# Altium PCB FOSS JTAG.PcbDoc
Units mil, origin at the board's own origin, x right, y up, seen from the top; angles counter-clockwise.
Board outline 1181.1 x 787.4 mil, 2 copper layers (Top Layer, Bottom Layer); 27 components, 28 nets, 132 pads, 51 vias.
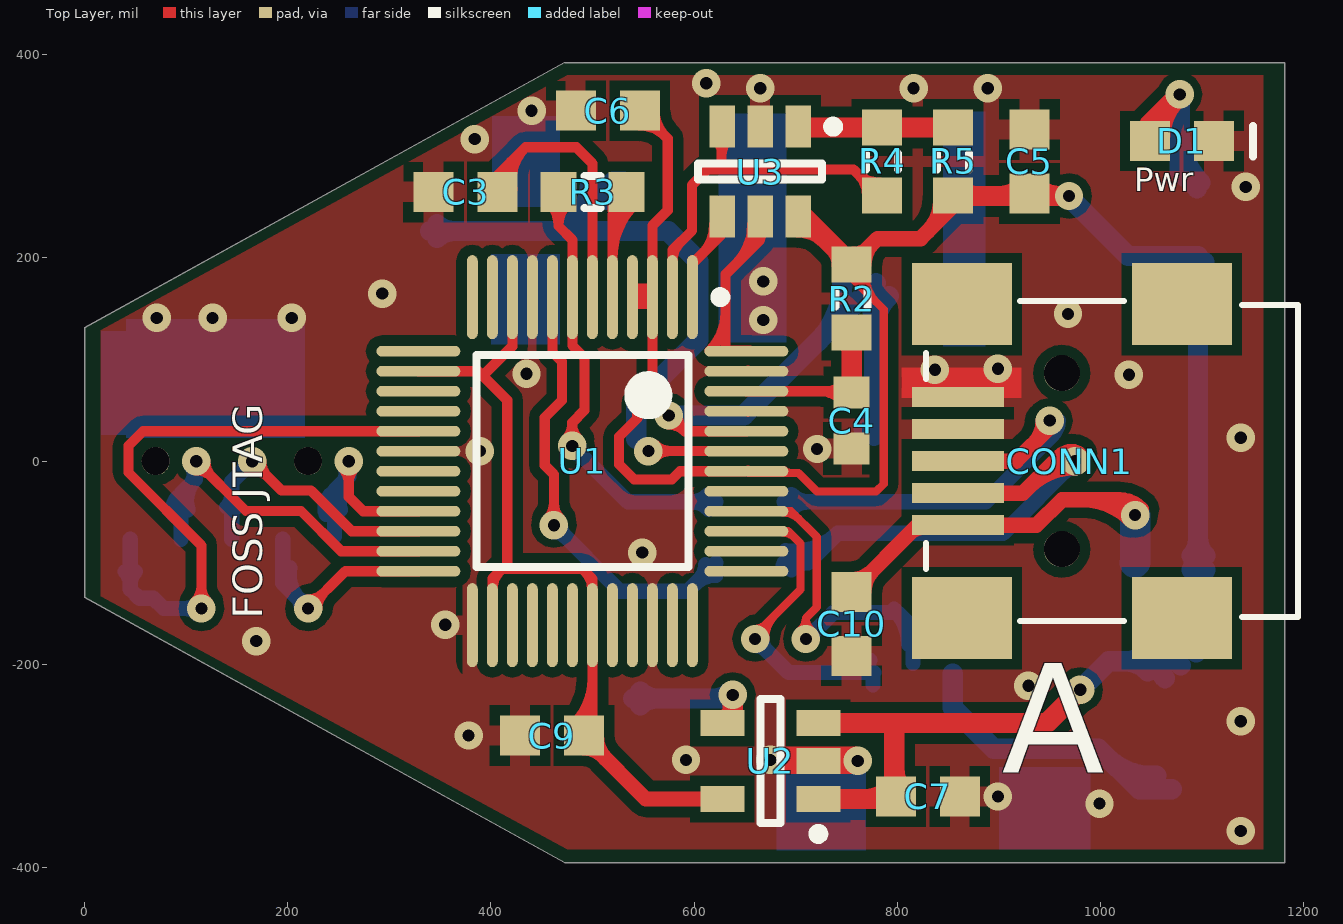
[diagram p0: Top Layer view]
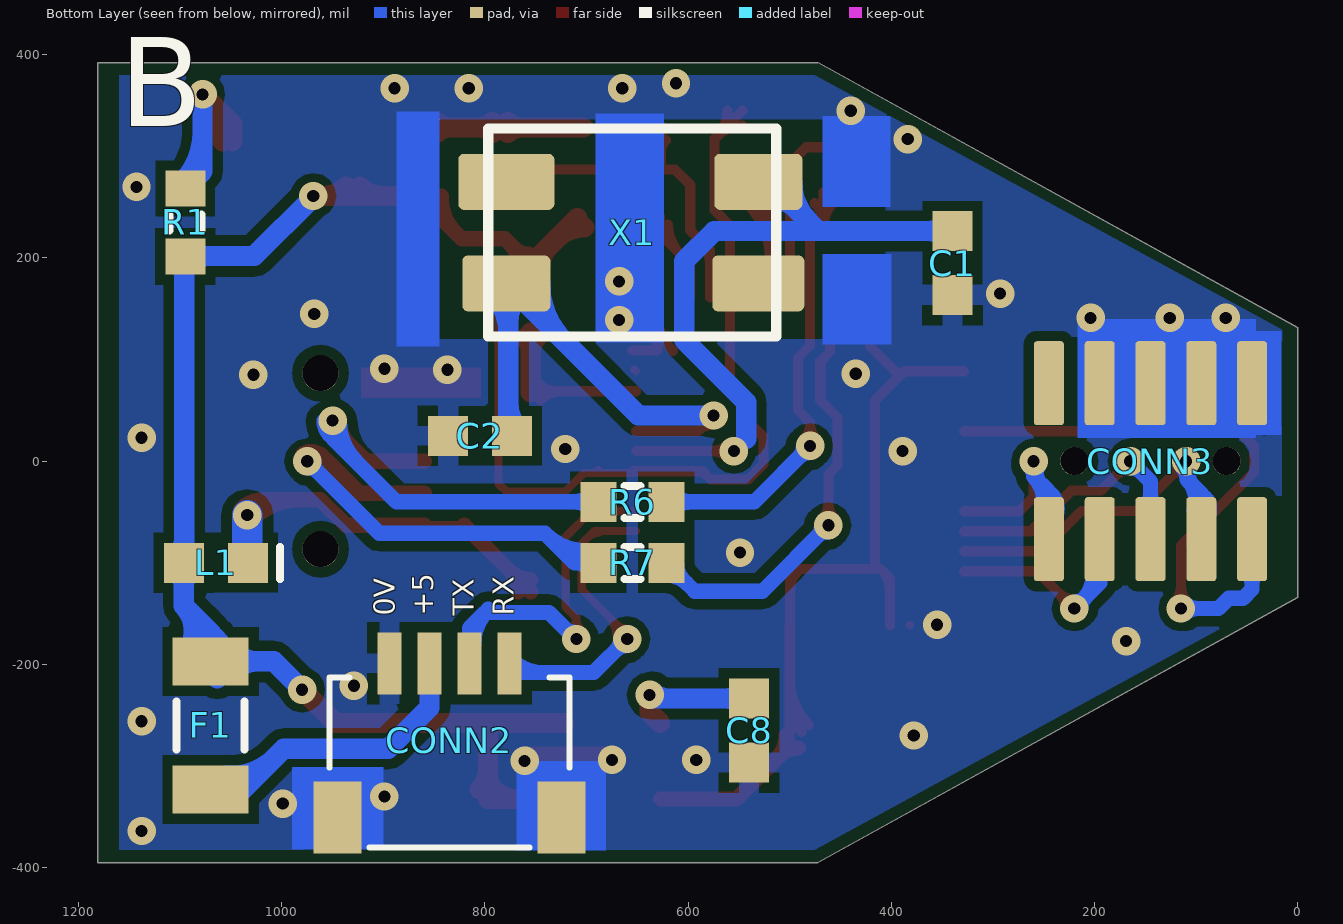
[diagram p1: Bottom Layer view, seen from below]
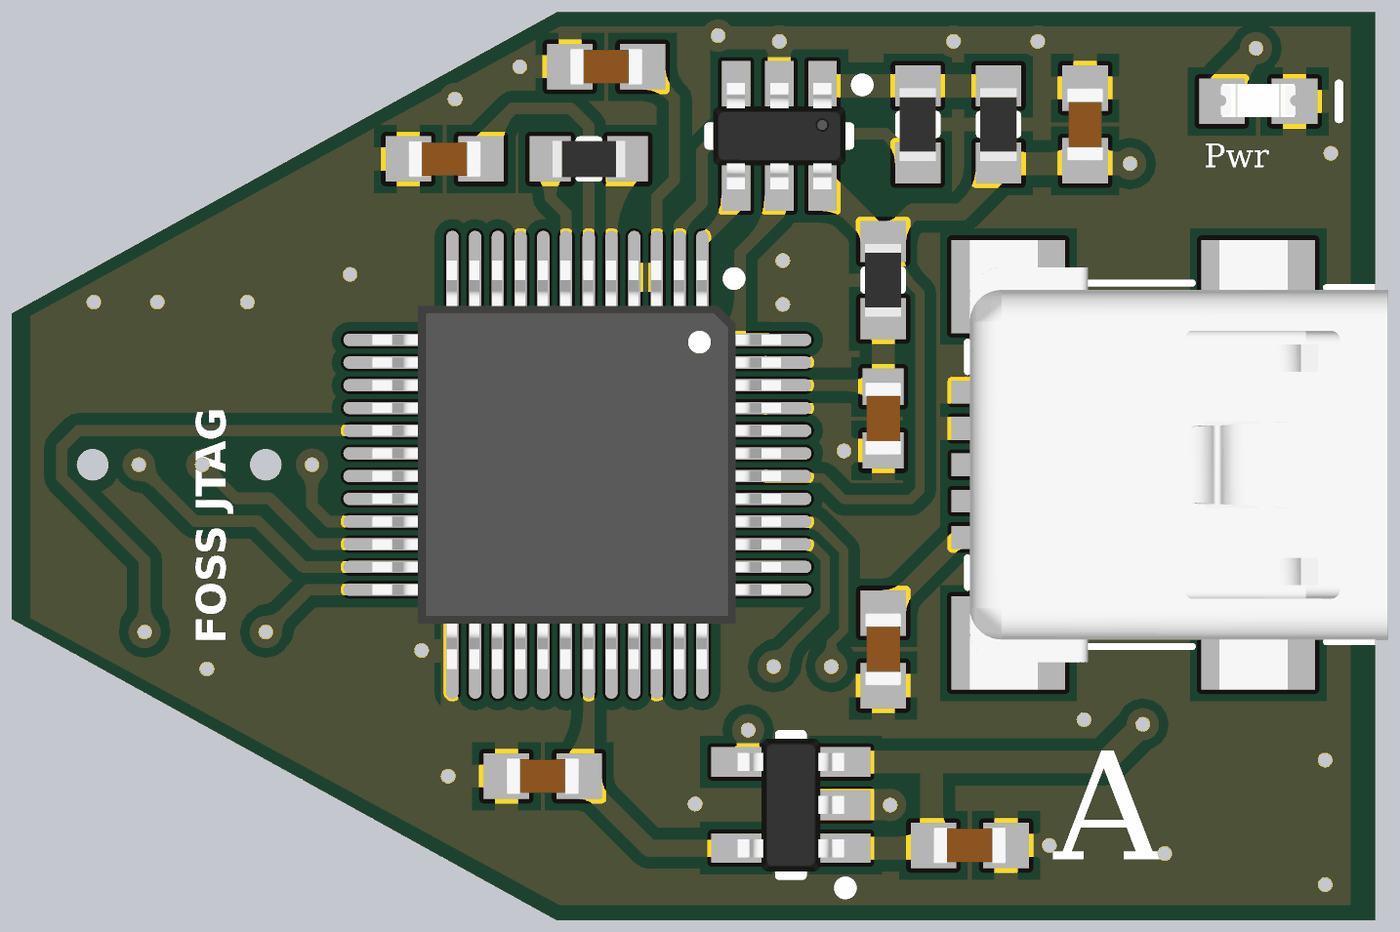
[diagram p2: 3D render of the assembled board from above, using the file's embedded part models]
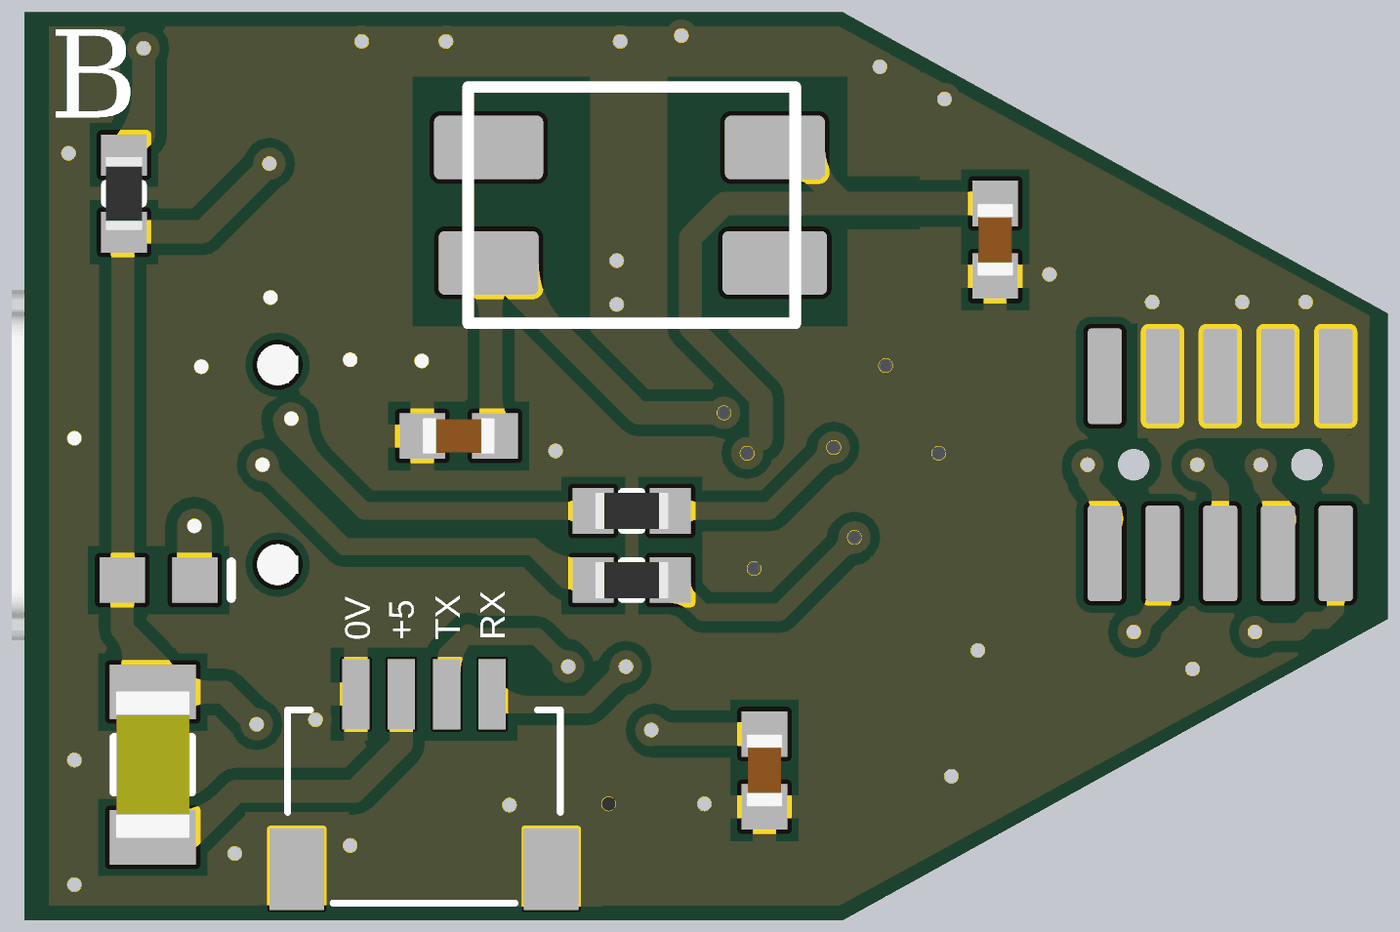
[diagram p3: 3D render of the assembled board from below, using the file's embedded part models]

## Layer stack, top to bottom
Top Layer: signal copper 1.4
Dielectric: dielectric 12.6, FR-4, Dk 4.8
Bottom Layer: signal copper 1.4

## Board outline
0,-133.78 472.44,-395 1181.1,-395 1181.1,392.4 472.44,392.4 0,131.18

## Design rules (kind name [scope] priority, off if disabled: settings)
Clearance PolyHCClearance [(InPolygon) vs InNet('POWER_IN') OR InNet('+VIN')] p1: gap=25
Clearance ViaClearance [(IsVia)] p2: gap=8
Clearance SmallFootPrint [(HasFootprint('SSOP20') or HasFootprint('0603x8') or HasFootprint('Molex-0610') or HasFootprint('54550-2094-C') or HasFootprint('TSOP48_M') or HasFootprint('QFP208_M') or HasFootprint('TSOP2-54_M') or HasFootprint('LQFP-32_M') or HasFootprint('LQFP-48_M')) vs not (InPolygon)] p3: gap=4
Clearance PolyClearance [(InPolygon)] p4: gap=10
Clearance [NOT (HasFootPrint('10MSOP') OR HasFootPrint('PCIEMINILATCH'))] p5: gap=8
ComponentClearance [NOT (HasFootprint('NX1255GB')) vs NOT (HasFootprint('NX1255GB'))] p1: gap=10 collisioncheckmode=3 verticalgap=10 showdistances=FALSE
DiffPairsRouting [All] p1: maxlimit=100 minlimit=8 mostfreqgap=10 maxuncoupledlength=500
FabricationTestPointUsage TestPointUsage [All] p1: valid=0 allowmultiple=TRUE
FabricationTestpoint Testpoint [All] p1: side=3 testpointundercomponent=TRUE minsize=40 maxsize=100 preferedsize=60 minholesize=0 maxholesize=40 preferedholesize=32 testpointgrid=1 allowsidetop=TRUE allowsidebottom=TRUE usegrid=TRUE gridtolerance=0.01
Height [All] p1: minheight=0 maxheight=1968.5 prefheight=500
HoleSize [All] p1: absolutevalues=TRUE maxlimit=165.35 minlimit=8 maxpercent=80.000 minpercent=20.000
LayerPairs [All] p1 off: enforce=TRUE
MinimumAnnularRing [All] p1: minimumring=7.87
MinimumSolderMaskSliver [All] p1: minsoldermaskwidth=4
PolygonConnect PolygonConnect_1 [(IsVia)] p1: connectstyle=Direct reliefconductorwidth=10 reliefentries=4 polygonreliefangle="90 Angle"
PolygonConnect [All] p2: connectstyle=Relief reliefconductorwidth=20 reliefentries=4 polygonreliefangle="90 Angle"
RoutingVias [All] p1: holewidth=8 width=16 viastyle="Through Hole" minholewidth=8 minwidth=16 maxholewidth=80 maxwidth=120
SMDNeckDown SMDNeckDown_1 [All] p1: percent=200.000
SMDNeckDown [NOT (InNet('+12'))] p2: percent=100.000
SilkscreenOverComponentPads [All] p1 off: minsilkscreentomaskgap=10
SolderMaskExpansion [All] p1: expansion=4
Width [All] p1: maxlimit=400 minlimit=1 preferedwidth=4
19 further rules are at their usual default settings.

## Components (designator, comment, footprint, x,y, rotation, side; value= is the part's Value field where it differs from the comment)
C1 "Cap603" CAP603N 340,195 r90 bottom
C2 "Cap603" CAP603N 805,25 r180 bottom
C3 "Cap603" CAP603N 375,265 r0 top
C4 "Cap603" CAP603L 755,40 r90 top
C5 "Cap603" CAP603N 930,295 r270 top
C6 "Cap603" CAP603N 515,345 r0 top
C7 "Cap603" CAP603N 830,-330 r180 top
C8 "Cap603" CAP603N 540,-265 r90 bottom
C9 "Cap603" CAP603N 460,-270 r0 top
C10 "Cap603" CAP603N 755,-160 r270 top
CONN1 "USB" "USB SMD" 1080,0 r90 top
CONN2 "UART B" "JST SH 4 Pin Side Entry" 835,-380 r180 bottom
CONN3 "JTAG Socket" "JTAG Sock 10-Pin" 145,0 r0 bottom
D1 "Blue" LED603N 1080,315 r180 top
F1 "MF-MSMF030-2" PTC1206N 1070,-260 r90 bottom
L1 "FB 500mA" IND603N 1065,-100 r0 bottom
R1 "Res603" RES603N 1095,235 r90 bottom
R2 "Res603" RES603N 755,160 r270 top
R3 "Res603" RES603N 500,265 r0 top
R4 "Res603" RES603N 785,295 r270 top
R5 "Res603" RES603N 855,295 r270 top
R6 "Res603" RES603N 655,-40 r180 bottom
R7 "Res603" RES603N 655,-100 r180 bottom
U1 "FT2232D R" FT2232D_M 490,0 r270 top
U2 "LP2985-3.3" SOT23-5N 675,-295 r180 top
U3 "EEPROM 93LC46BT-I/OT" SOT23-6AM 665,285 r270 top
X1 "6MHz" "XTAL ABMM-6.000MHZ-B2-T" 655,225 r0 bottom

## Footprints (in the part's own frame and the unit in brackets; to place one, negate y for a bottom-side part, rotate by r counter-clockwise, add the part's x,y. Pads: shape width x height; smd on the part's side, far side on the other; paste and mask are expansions set on the pad)
CAP603L [mm] "Chip Capacitor, Body 1.6x0.8mm, IPC High Density"
  rect 0.8x0.9 smd: 1(-0.7,0) 2(0.7,0)
  body extent -0.8,-0.4 0.8,0.4, height 0.77
CAP603N [mm] "Chip Capacitor, Body 1.6x0.8mm, IPC Medium Density"
  rect 1x1 smd: 1(-0.8,0) 2(0.8,0)
  body extent -0.8,-0.4 0.8,0.4, height 0.77
FT2232D_M [mm] "FTDI 2232D LQFP-48 IPC M Low Density"
  oval 2.1x0.27 smd mask+0.06: 1(-4.1,2.75) 2(-4.1,2.25) 3(-4.1,1.75) 4(-4.1,1.25) 5(-4.1,0.75) 6(-4.1,0.25) 7(-4.1,-0.25) 8(-4.1,-0.75) 9(-4.1,-1.25) 10(-4.1,-1.75) 11(-4.1,-2.25) 12(-4.1,-2.75) 25(4.1,-2.75) 26(4.1,-2.25) 27(4.1,-1.75) 28(4.1,-1.25) 29(4.1,-0.75) 30(4.1,-0.25) 31(4.1,0.25) 32(4.1,0.75) 33(4.1,1.25) 34(4.1,1.75) 35(4.1,2.25) 36(4.1,2.75)
  oval 0.27x2.1 smd mask+0.06: 13(-2.75,-4.1) 14(-2.25,-4.1) 15(-1.75,-4.1) 16(-1.25,-4.1) 17(-0.75,-4.1) 18(-0.25,-4.1) 19(0.25,-4.1) 20(0.75,-4.1) 21(1.25,-4.1) 22(1.75,-4.1) 23(2.25,-4.1) 24(2.75,-4.1) 37(2.75,4.1) 38(2.25,4.1) 39(1.75,4.1) 40(1.25,4.1) 41(0.75,4.1) 42(0.25,4.1) 43(-0.25,4.1) 44(-0.75,4.1) 45(-1.25,4.1) 46(-1.75,4.1) 47(-2.25,4.1) 48(-2.75,4.1)
  silkscreen extent -4.22,-2.65 2.65,3.57, body extent -4.5,-4.51 4.5,4.49, height 1.56
IND603N [mm] "Chip Inductor, Body 1.6x0.8mm, IPC Medium Density"
  rect 1x1 smd: 1(-0.8,0) 2(0.8,0)
  silkscreen extent -1.6,-0.4 -1.6,0.4, body extent -0.87,-0.48 0.87,0.48, height 0.71
"JST SH 4 Pin Side Entry" [mm] "SM04B-SRSS-TB"
  rect 1.2x1.8 smd paste+0 mask+0.051: 0(-2.8,0.75) 0(2.8,0.75)
  rect 0.6x1.55 smd paste+0 mask+0.051: 1(-1.5,4.6) 2(-0.5,4.6) 3(0.5,4.6) 4(1.5,4.6)
  silkscreen extent -3,0 3,4.25, body extent -3,0 3,4.25, height 2.9
"JTAG Sock 10-Pin" [mm]
  round 0.7 hole 0.7 unplated paste+0 mask+0: 0(-1.905,0) 0(1.905,0)
  rrect20% 0.75x2.1 smd: 1(-2.54,-1.95) 2(-2.54,1.95) 3(-1.27,-1.95) 4(-1.27,1.95) 5(0,-1.95) 6(0,1.95) 7(1.27,-1.95) 8(1.27,1.95) 9(2.54,-1.95) 10(2.54,1.95)
  body extent -3.17,-1.97 3.17,1.97, height 3.81
LED603N [mm] "Chip LED, Body 1.6x0.8mm, IPC Medium Density"
  rect 1x1 smd: 1(-0.8,0) 2(0.8,0)
  silkscreen extent -1.78,-0.38 -1.78,0.38, body extent -0.82,-0.38 0.82,0.34, height 0.68
PTC1206N [mm] "Chip Inductor, Body 3.2x1.6mm, IPC Medium Density"
  rect 1.2x1.9 smd: 1(-1.6,0) 2(1.6,0)
  silkscreen extent -0.6,-0.85 0.6,0.85, body extent -1.61,-0.81 1.61,0.81, height 0.61
RES603N [mm] "Chip Resistor, Body 1.6x0.8mm, IPC Medium Density"
  rect 0.9x1 smd: 1(-0.85,0) 2(0.85,0)
  silkscreen extent -0.2,-0.4 0.2,0.4, body extent -0.8,-0.4 0.8,0.4, height 0.44
SOT23-5N [mm] "SOT23, 5-Leads, Body 2.9x1.6mm, Pitch 0.95mm, Lead Span 2.8mm, IPC Medium Density"
  rect 1.1x0.65 smd mask+0.085: 1(-1.2,0.95) 2(-1.2,0) 3(-1.2,-0.95) 4(1.2,-0.95) 5(1.2,0.95)
  silkscreen extent -1.33,-1.55 0.25,1.95, body extent -1.17,-1.46 1.17,1.46, height 0.97
SOT23-6AM [mm]
  rect 1.05x0.63 smd mask+0.085: 1(-1.125,0.95) 2(-1.125,0) 3(-1.125,-0.95) 4(1.125,-0.95) 5(1.125,0) 6(1.125,0.95)
  silkscreen extent -1.25,-1.55 0.2,1.95, body extent -1.17,-1.46 1.17,1.46, height 1
"USB SMD" [mm] "DX2R005HN2E700"
  rect 2.05x2.5 smd: 0(-3.925,0) 0(-3.925,5.5) 0(3.925,0) 0(3.925,5.5)
  rect 0.5x2.3 smd mask+0.085: 1(-1.6,5.6) 2(-0.8,5.6) 3(0,5.6) 4(0.8,5.6) 5(1.6,5.6)
  round 0.9 hole 0.9 unplated: 6(-2.2,3) 6(2.2,3)
  silkscreen extent -4,-2.9 4,6.4, body extent -4.95,-2.85 4.95,6.35, height 4.17
"XTAL ABMM-6.000MHZ-B2-T" [mm]
  rrect20% 2.2x1.4 smd: 1(-3.15,-1.27) 3(3.15,1.27)
  rrect20% 2.3x1.4 smd: 2(-3.15,1.27)
  rrect20% 2.4x1.4 smd: 4(3.15,-1.27)
  silkscreen extent -3.6,-2.6 3.6,2.6, body extent -3.61,-2.59 3.58,2.59, height 1.3

## Part data
C1 C2 C3 C4 C5 C6 C7 C8 C9 C10: "Capacitor SMD"
CONN1: library part USB_SMT_B, "USB Type-B SMT Socket"
CONN2: library part "JST-SH 4-pin Side Entry Socket", "JST-SH 4-pin Side Entry Socket"
CONN3: "Socket, 5-Pin, Dual row"
D1: library part "LED 603 Bl", "Blue 603 LED"
F1: library part "PTC 8V 500mA SMD", "PTC 8V 500mA SMD"
L1: library part "FerriteBead 500mA", "Ferrite Bead 500mA"
R1 R2 R3 R4 R5 R6 R7: "Resistor SMD"
U1: library part FT2232D, "Dual USB UART/FIFO Chip, LQFP-48"
U2: "3.3V 150mA LDO Regulator"
U3: library part 93LC46BT-I/OT, "EEPROM 1K, 64x16-bit, 2.5V, 6-Pin SOT-23, Industrial Temperature, Tape and Reel"
X1: library part "XTAL ABMM-6.000MHZ-B2-T", "SMD Quartz Crystal 6Mhz"

## Via types
v1: diameter 28, hole 12, Top Layer to Bottom Layer, tented both sides, 51 vias

## Nets (pads, with @x,y where several pads share a name; then routed paths per layer and width w, separated by ;. In a path a pad name is that pad's centre, name@x,y a point inside that pad or via, vN(x,y) a via of type N, cw(c..) or ccw(c..) an arc to the next point about the centre after c; other vN are vias at no path point)
3V3: C9.2 U1.10 U1.14 U1.26 U1.31 U2.5 | length 1189.5
  Top Layer w10: U1.14 387.42,88.58 416,60 416,-105 ; 392,84 421.1,113.1 U1.10 ; U1.26 401.42,-115.58 411,-106 490,-106 499.84,-115.84 U1.31 ; C9.2@500,-280 U1.31@500,-161.58 ; U1.26@401.73,-125.39 cw(c426.18,-125.39) 408.89,-108.11 ; U1.26@401.73,-125.39 cw(c426.18,-125.39) 408.89,-108.11 ; U1.26@401.73,-125.39 cw(c426.18,-125.39) 408.89,-108.11 ; 492.55,-108.55 cw(c475.71,-125.39) U1.31@499.53,-125.39 ; 492.55,-108.55 cw(c475.71,-125.39) U1.31@499.53,-125.39 ; 492.55,-108.55 cw(c475.71,-125.39) U1.31@499.53,-125.39 ; C9.2@481.11,-259.62 ccw(c435.51,-214.02) 500,-214.02 cw(c435.51,-214.02) C9.2@481.11,-259.62 ; C9.2@488.18,-266.69 ccw(c459.66,-238.16) 500,-238.16 cw(c459.66,-238.16) C9.2@488.18,-266.69
  Top Layer w15: C9.2@500,-280 552.4,-332.4 U2.5@627,-332.4 ; C9.2@491.5,-282.18 cw(c491.5,-307.99) 509.74,-289.74 ccw(c491.5,-307.99) C9.2@491.5,-282.18 ; C9.2@503.68,-270 ccw(c536.71,-270) 513.36,-293.36 cw(c536.71,-270) C9.2@503.68,-270
GND: C1.1 C2.1 C3.1 C4.1 C5.1 C6.1 C7.1 C8.1 C9.1 C10.2 CONN1.4 CONN1.5 CONN2.0 CONN2.1 CONN3.1 CONN3.3 CONN3.5 CONN3.7 D1.1 U1.9 U1.18 U1.25 U1.34 U1.45 U1.47 U2.2 U3.2 | length 5.3
  Top Layer w8: U1.25 U1.25@381.92,-161.23 ; U1.45 U1.45@653.2,47.43 ; U1.47 U1.47@653.2,90.36
  other v1: 1138,-364 999,-337 899,-330 761,-295 592,-294 675,-294 378,-270 1138,-256 929,-221 169,-177 355,-161 549,-90 389,10 721,12 1138,23 1028,85 435,86 837,90 899,91 668,139 71,141 126,141 204,141 968,145 293,165 668,177 1143,270 384,317 440,345 665,367 816,367 889,367 612,372
NetC1_2: C1.2 U1.43 X1.1 | length 1206.6
  Top Layer w10: v1(555,10) U1.43@651.26,10 ; v1@561.36,3.64 cw(c576.73,-11.73) 576.73,10 ; v1@561.36,3.64 cw(c576.73,-11.73) 576.73,10 ; v1@561.36,3.64 cw(c576.73,-11.73) 576.73,10 ; v1@561.36,3.64 cw(c576.73,-11.73) 576.73,10 ; v1@561.36,16.36 ccw(c576.73,31.73) 576.73,10 ; v1@561.36,16.36 ccw(c576.73,31.73) 576.73,10 ; v1@561.36,16.36 ccw(c576.73,31.73) 576.73,10 ; v1@561.36,16.36 ccw(c576.73,31.73) 576.73,10
  Bottom Layer w20: C1.2 472,226.5 ; X1.1@530.98,270.06 X1.1 520.5,275 472,226.5 ; 543,22 543,58.25 604,119.25 604,197.05 574.55,226.5 472,226.5 ; C1.2@346.85,219.65 cw(c363.38,203.11) 363.38,226.5 ; C1.2@346.85,219.65 cw(c363.38,203.11) 363.38,226.5 ; C1.2@346.85,219.65 cw(c363.38,203.11) 363.38,226.5 ; C1.2@346.85,219.65 cw(c363.38,203.11) 363.38,226.5 ; C1.2@346.85,233.34 ccw(c363.38,249.88) 363.38,226.5 ; C1.2@346.85,233.34 ccw(c363.38,249.88) 363.38,226.5 ; C1.2@346.85,233.34 ccw(c363.38,249.88) 363.38,226.5 ; C1.2@346.85,233.34 ccw(c363.38,249.88) 363.38,226.5 ; 481.54,236.03 ccw(c442.57,275) X1.1@497.68,275 ; 481.54,236.03 ccw(c442.57,275) X1.1@497.68,275 ; 481.54,236.03 ccw(c442.57,275) X1.1@497.68,275 ; 481.54,236.03 ccw(c442.57,275) X1.1@497.68,275 ; X1.1@494.25,248.75 cw(c515.24,227.77) X1.1@515.24,257.44 ; X1.1@494.25,248.75 cw(c515.24,227.77) X1.1@515.24,257.44 ; X1.1@494.25,248.75 cw(c515.24,227.77) X1.1@515.24,257.44 ; X1.1@494.25,248.75 cw(c515.24,227.77) X1.1@515.24,257.44
NetC2_2: C2.2 U1.44 X1.3 | length 1186.9
  Top Layer w10: v1(575,45) 590.47,29.53 U1.44 ; 590.36,29.64 cw(c605.73,45) 584,45 ccw(c605.73,45) 590.36,29.64 ; 590.36,29.64 ccw(c575,14.27) 575,36 cw(c575,14.27) 590.36,29.64
  Bottom Layer w20: v1(575,45) 649.02,45 X1.3@777,172.98 ; C2.2@777,25 X1.3@777,172.98 ; X1.3 X1.3@777,172.98 ; 722.16,118.14 ccw(c665.3,175) X1.3@745.71,175 ; 722.16,118.14 ccw(c665.3,175) X1.3@745.71,175 ; 722.16,118.14 ccw(c665.3,175) X1.3@745.71,175 ; 722.16,118.14 ccw(c665.3,175) X1.3@745.71,175 ; X1.3@766.6,162.58 cw(c741.49,137.48) 777,137.48 ; X1.3@766.6,162.58 cw(c741.49,137.48) 777,137.48 ; X1.3@766.6,162.58 cw(c741.49,137.48) 777,137.48 ; X1.3@766.6,162.58 cw(c741.49,137.48) 777,137.48 ; C2.2@766.66,31.85 ccw(c741.68,56.82) 777,56.82 ; C2.2@766.66,31.85 ccw(c741.68,56.82) 777,56.82 ; C2.2@766.66,31.85 ccw(c741.68,56.82) 777,56.82 ; C2.2@766.66,31.85 ccw(c741.68,56.82) 777,56.82 ; 777,127.74 cw(c826.27,127.74) X1.3@791.43,162.58 ; 777,127.74 cw(c826.27,127.74) X1.3@791.43,162.58 ; 777,127.74 cw(c826.27,127.74) X1.3@791.43,162.58 ; 777,127.74 cw(c826.27,127.74) X1.3@791.43,162.58
NetC3_2: C3.2 U1.6 | length 414.4
  Top Layer w10: C3.2 406.5,281.5 434,309 ; U1.6 499.84,293.16 484,309 434,309 ; 434,309 ccw(c467.23,275.77) 420.96,267.56 cw(c467.23,275.77) 434,309 ; C3.2@411.11,265.82 cw(c444.18,271.68) 420.43,295.43 ccw(c444.18,271.68) C3.2@411.11,265.82
NetC4_2: C4.2 R2.2 U1.46 | length 361.1
  Top Layer w10: U1.46 C4.2@755,68.9 ; 723.85,68.9 cw(c723.85,38.38) 745.43,59.96 ccw(c723.85,38.38) 723.85,68.9 ; 730.32,68.9 ccw(c730.32,90.27) 745.43,75.16 cw(c730.32,90.27) 730.32,68.9
  Top Layer w20: C4.2 R2.2 ; R2.2@749.54,121.08 cw(c736.37,107.91) 755,107.91 ; R2.2@749.54,121.08 cw(c736.37,107.91) 755,107.91 ; R2.2@749.54,121.08 cw(c736.37,107.91) 755,107.91 ; R2.2@749.54,121.08 cw(c736.37,107.91) 755,107.91 ; 755,107.91 cw(c773.63,107.91) R2.2@760.46,121.08 ; 755,107.91 cw(c773.63,107.91) R2.2@760.46,121.08 ; 755,107.91 cw(c773.63,107.91) R2.2@760.46,121.08 ; 755,107.91 cw(c773.63,107.91) R2.2@760.46,121.08
NetC8_2: C8.2 U2.4 | length 310.7
  Top Layer w20: U2.4 638,-247.35 v1(638,-230)
  Bottom Layer w20: C8.2 v1@638,-233.5 ; C8.2@546.85,-240.35 cw(c563.38,-256.89) 563.38,-233.5 ; C8.2@546.85,-240.35 cw(c563.38,-256.89) 563.38,-233.5 ; C8.2@546.85,-240.35 cw(c563.38,-256.89) 563.38,-233.5 ; C8.2@546.85,-240.35 cw(c563.38,-256.89) 563.38,-233.5 ; C8.2@546.85,-226.66 ccw(c563.38,-210.12) 563.38,-233.5 ; C8.2@546.85,-226.66 ccw(c563.38,-210.12) 563.38,-233.5 ; C8.2@546.85,-226.66 ccw(c563.38,-210.12) 563.38,-233.5 ; C8.2@546.85,-226.66 ccw(c563.38,-210.12) 563.38,-233.5 ; 619.88,-233.5 ccw(c619.88,-211.88) 635.17,-227.17 cw(c619.88,-211.88) 619.88,-233.5
NetC10_1: C10.1 CONN1.1 L1.1 | length 709.9
  Top Layer w8: CONN1.1@820.51,-62.99 CONN1.1
  Top Layer w15: C10.1 CONN1.1@820.51,-62.99 ; CONN1.1 937.01,-62.99 962,-38 1019,-38 v1(1034,-53) ; 775.8,-107.7 cw(c755,-86.9) 755,-116.32 ccw(c755,-86.9) 775.8,-107.7 ; 775.8,-107.7 ccw(c796.6,-128.5) 767.18,-128.5 cw(c796.6,-128.5) 775.8,-107.7 ; 813.98,-69.52 cw(c824.09,-79.64) CONN1.1@824.09,-65.33 ; 813.98,-69.52 cw(c824.09,-79.64) CONN1.1@824.09,-65.33 ; 813.98,-69.52 cw(c824.09,-79.64) CONN1.1@824.09,-65.33 ; 813.98,-69.52 cw(c824.09,-79.64) CONN1.1@824.09,-65.33 ; 1022.9,-41.9 cw(c1011.81,-53) 1027.5,-53 ccw(c1011.81,-53) 1022.9,-41.9 ; 1022.9,-41.9 ccw(c1034,-30.81) 1034,-46.5 cw(c1034,-30.81) 1022.9,-41.9 ; 982.09,-38 cw(c982.09,-104.91) 1029.4,-57.6 ccw(c982.09,-104.91) 982.09,-38 ; 1018.31,-38 cw(c1018.31,-68.69) 1040.01,-46.99 ccw(c1018.31,-68.69) 1018.31,-38
  Bottom Layer w30: L1.1 1034,-99.5 v1(1034,-53)
NetCONN1_2: CONN1.2 R7.1 | length 1307.1
  Top Layer w15: CONN1.2 923.5,-31.5 955,0 v1(975,0) ; 959.31,0 cw(c959.31,-15.69) 970.4,-4.6 ccw(c959.31,-15.69) 959.31,0 ; 959.31,0 ccw(c959.31,15.69) 970.4,4.6 cw(c959.31,15.69) 959.31,0 ; 929.76,-25.24 cw(c975,-70.48) 975,-6.5 ccw(c975,-70.48) 929.76,-25.24 ; 945,-10 cw(c961.4,-26.4) 972.02,-5.78 ccw(c961.4,-26.4) 945,-10 ; 955.37,0.37 cw(c975,-19.26) 975,8.5 ccw(c975,-19.26) 955.37,0.37 ; 959.53,4.53 cw(c971.28,-7.22) 978.89,7.56 ccw(c971.28,-7.22) 959.53,4.53
  Bottom Layer w15: R7.1 712,-100 ; v1(975,0) 904,-71 741,-71 ; R7.1@687.77,-102.76 ccw(c693.23,-65.48) 719.88,-92.12 ; R7.1@687.77,-102.76 ccw(c693.23,-65.48) 719.88,-92.12 ; R7.1@687.77,-102.76 ccw(c693.23,-65.48) 719.88,-92.12 ; R7.1@687.77,-102.76 ccw(c693.23,-65.48) 719.88,-92.12 ; R7.1@689.94,-87.92 ccw(c698.62,-28.63) 741,-71 ; R7.1@689.94,-87.92 ccw(c698.62,-28.63) 741,-71 ; R7.1@689.94,-87.92 ccw(c698.62,-28.63) 741,-71 ; R7.1@689.94,-87.92 ccw(c698.62,-28.63) 741,-71 ; R7.1@695.93,-106.98 cw(c712,-122) 712,-100 ; R7.1@695.93,-106.98 cw(c712,-122) 712,-100 ; R7.1@695.93,-106.98 cw(c712,-122) 712,-100 ; R7.1@695.93,-106.98 cw(c712,-122) 712,-100 ; R7.1@695.93,-93.02 ccw(c712,-78) 712,-100 ; R7.1@695.93,-93.02 ccw(c712,-78) 712,-100 ; R7.1@695.93,-93.02 ccw(c712,-78) 712,-100 ; R7.1@695.93,-93.02 ccw(c712,-78) 712,-100 ; 712,-100 741,-71 ; 963.9,-11.1 cw(c975,-22.19) 975,-6.5 ccw(c975,-22.19) 963.9,-11.1 ; 963.9,-11.1 ccw(c952.81,0) 968.5,0 cw(c952.81,0) 963.9,-11.1
NetCONN1_3: CONN1.3 R6.1 | length 794
  Top Layer w15: CONN1.3 917,0 950,33 v1(950,40) ; 933.95,16.95 ccw(c910.91,40) 943.5,40 cw(c910.91,40) 933.95,16.95
  Bottom Layer w8: v1@949,39 v1(950,40)
  Bottom Layer w15: R6.1 887,-40 950,23 v1(950,40) ; R6.1@695.69,-47.22 cw(c713.13,-64.66) 713.13,-40 ; R6.1@695.69,-47.22 cw(c713.13,-64.66) 713.13,-40 ; R6.1@695.69,-47.22 cw(c713.13,-64.66) 713.13,-40 ; R6.1@695.69,-47.22 cw(c713.13,-64.66) 713.13,-40 ; R6.1@695.69,-32.78 ccw(c713.13,-15.34) 713.13,-40 ; R6.1@695.69,-32.78 ccw(c713.13,-15.34) 713.13,-40 ; R6.1@695.69,-32.78 ccw(c713.13,-15.34) 713.13,-40 ; R6.1@695.69,-32.78 ccw(c713.13,-15.34) 713.13,-40 ; 950,24.31 cw(c965.69,24.31) 954.6,35.4 ccw(c965.69,24.31) 950,24.31 ; 950,24.31 ccw(c934.31,24.31) 945.4,35.4 cw(c934.31,24.31) 950,24.31 ; 926.88,-0.12 ccw(c886.77,40) 943.5,40 cw(c886.77,40) 926.88,-0.12 ; 952.49,25.49 ccw(c937.98,40) 958.5,40 cw(c937.98,40) 952.49,25.49
NetCONN2_2: CONN2.2 F1.1 | length 387.5
  Bottom Layer w20: CONN2.2@854.68,-208.9 854.68,-242.68 895,-283 998,-283 1037.99,-322.99 F1.1 ; 1007.12,-292.12 ccw(c1049.51,-249.72) 1054.98,-309.43 cw(c1049.51,-249.72) 1007.12,-292.12
NetD1_2: D1.2 R1.2 | length 367
  Top Layer w20: D1.2 1048.5,331.5 v1(1078,361) ; D1.2@1058.19,315 cw(c1121.41,315) 1076.71,359.71 ccw(c1121.41,315) D1.2@1058.19,315
  Bottom Layer w20: v1(1078,361) 1078,285.46 R1.2 ; 1078,323.38 ccw(c1147.95,323.38) 1098.49,273.92 cw(c1147.95,323.38) 1078,323.38
NetR3_1: R3.1 R6.2 U1.7 | length 895.3
  Top Layer w10: R3.1 466.54,231.46 480.16,217.84 U1.7 480.16,113.84 492,102 492,50 480,38 v1(480,15) ; R3.1@457.54,254.04 cw(c435.84,232.33) 466.54,232.33 ; R3.1@457.54,254.04 cw(c435.84,232.33) 466.54,232.33 ; R3.1@457.54,254.04 cw(c435.84,232.33) 466.54,232.33 ; R3.1@457.54,254.04 cw(c435.84,232.33) 466.54,232.33 ; 466.54,232.33 cw(c497.24,232.33) R3.1@475.53,254.04 ; 466.54,232.33 cw(c497.24,232.33) R3.1@475.53,254.04 ; 466.54,232.33 cw(c497.24,232.33) R3.1@475.53,254.04 ; 466.54,232.33 cw(c497.24,232.33) R3.1@475.53,254.04 ; 480,36.73 cw(c458.27,36.73) 473.64,21.36 ccw(c458.27,36.73) 480,36.73 ; 480,36.73 ccw(c501.73,36.73) 486.36,21.36 cw(c501.73,36.73) 480,36.73
  Bottom Layer w15: v1(480,15) 535,-40 R6.2 ; 491.1,3.9 cw(c502.19,15) 486.5,15 ccw(c502.19,15) 491.1,3.9 ; 491.1,3.9 ccw(c480,-7.19) 480,8.5 cw(c480,-7.19) 491.1,3.9 ; 596.87,-40 cw(c596.87,-64.66) R6.2@614.31,-47.22 ; 596.87,-40 ccw(c596.87,-15.34) R6.2@614.31,-32.78 ; 596.87,-40 cw(c596.87,-64.66) R6.2@614.31,-47.22 ; 596.87,-40 ccw(c596.87,-15.34) R6.2@614.31,-32.78 ; 596.87,-40 ccw(c596.87,-15.34) R6.2@614.31,-32.78 ; 596.87,-40 cw(c596.87,-64.66) R6.2@614.31,-47.22 ; 596.87,-40 ccw(c596.87,-15.34) R6.2@614.31,-32.78 ; 596.87,-40 cw(c596.87,-64.66) R6.2@614.31,-47.22
NetR3_2: R3.2 U1.5 | length 707.6
  Top Layer w10: U1.5 519.53,242.53 533.46,256.46 R3.2 ; U1.5@519.53,198.69 cw(c597.81,198.69) R3.2@542.46,254.04 ; U1.5@519.53,198.69 cw(c597.81,198.69) R3.2@542.46,254.04 ; U1.5@519.53,198.69 cw(c597.81,198.69) R3.2@542.46,254.04 ; U1.5@519.53,198.69 cw(c597.81,198.69) R3.2@542.46,254.04 ; 519.53,222.83 cw(c573.67,222.83) R3.2@535.39,261.11 ; 519.53,222.83 cw(c573.67,222.83) R3.2@535.39,261.11 ; 519.53,222.83 cw(c573.67,222.83) R3.2@535.39,261.11 ; 519.53,222.83 cw(c573.67,222.83) R3.2@535.39,261.11 ; R3.2@519.53,246.97 cw(c549.53,246.97) R3.2@528.31,268.18 ; R3.2@519.53,246.97 cw(c549.53,246.97) R3.2@528.31,268.18 ; R3.2@519.53,246.97 cw(c549.53,246.97) R3.2@528.31,268.18 ; R3.2@519.53,246.97 cw(c549.53,246.97) R3.2@528.31,268.18 ; R3.2@522.81,245.81 ccw(c517.76,250.87) R3.2@523.41,255.25 ; R3.2@522.81,245.81 ccw(c517.76,250.87) R3.2@523.41,255.25 ; R3.2@522.81,245.81 ccw(c517.76,250.87) R3.2@523.41,255.25 ; R3.2@522.81,245.81 ccw(c517.76,250.87) R3.2@523.41,255.25 ; R3.2@522.97,245.97 cw(c533.46,235.47) R3.2@533.46,250.32 ; R3.2@522.97,245.97 cw(c533.46,235.47) R3.2@533.46,250.32 ; R3.2@522.97,245.97 cw(c533.46,235.47) R3.2@533.46,250.32 ; R3.2@522.97,245.97 cw(c533.46,235.47) R3.2@533.46,250.32
NetR4_1: R4.1 R5.1 U3.1 | length 503.9
  Top Layer w20: U3.1@703.23,328.46 R5.1@856,328.46 ; 764.4,328.46 cw(c764.4,309.83) R4.1@777.58,323.01 ; 764.4,328.46 ccw(c764.4,347.09) R4.1@777.58,333.92 ; 764.4,328.46 cw(c764.4,309.83) R4.1@777.58,323.01 ; 764.4,328.46 ccw(c764.4,347.09) R4.1@777.58,333.92 ; 764.4,328.46 ccw(c764.4,347.09) R4.1@777.58,333.92 ; 764.4,328.46 cw(c764.4,309.83) R4.1@777.58,323.01 ; 764.4,328.46 ccw(c764.4,347.09) R4.1@777.58,333.92 ; 764.4,328.46 cw(c764.4,309.83) R4.1@777.58,323.01 ; R4.1@792.42,323.01 cw(c805.6,309.83) 805.6,328.46 ; R4.1@792.42,323.01 cw(c805.6,309.83) 805.6,328.46 ; R4.1@792.42,323.01 cw(c805.6,309.83) 805.6,328.46 ; R4.1@792.42,323.01 cw(c805.6,309.83) 805.6,328.46 ; R4.1@792.42,333.92 ccw(c805.6,347.09) 805.6,328.46 ; R4.1@792.42,333.92 ccw(c805.6,347.09) 805.6,328.46 ; R4.1@792.42,333.92 ccw(c805.6,347.09) 805.6,328.46 ; R4.1@792.42,333.92 ccw(c805.6,347.09) 805.6,328.46 ; 834.4,328.46 cw(c834.4,309.83) R5.1@847.58,323.01 ; 834.4,328.46 ccw(c834.4,347.09) R5.1@847.58,333.92 ; 834.4,328.46 cw(c834.4,309.83) R5.1@847.58,323.01 ; 834.4,328.46 ccw(c834.4,347.09) R5.1@847.58,333.92 ; 834.4,328.46 ccw(c834.4,347.09) R5.1@847.58,333.92 ; 834.4,328.46 cw(c834.4,309.83) R5.1@847.58,323.01 ; 834.4,328.46 ccw(c834.4,347.09) R5.1@847.58,333.92 ; 834.4,328.46 cw(c834.4,309.83) R5.1@847.58,323.01
NetR4_2: R4.2 U1.2 U3.3 | length 636.9
  Top Layer w10: U1.2 578.58,207.58 598,227 598,272 613,287 757,287 782.46,261.54 R4.2 ; 627,287 U3.3@627,330.29 ; U1.2@578.9,197.44 cw(c604.14,197.44) 586.29,215.29 ; U1.2@578.9,197.44 cw(c604.14,197.44) 586.29,215.29 ; U1.2@578.9,197.44 cw(c604.14,197.44) 586.29,215.29 ; U3.3@622.09,315.91 cw(c610.22,304.04) 627,304.04 ccw(c610.22,304.04) U3.3@622.09,315.91 ; U3.3@622.36,315.79 cw(c611.17,304.6) 627,304.6 ccw(c611.17,304.6) U3.3@622.36,315.79 ; 627,301.15 cw(c647.86,301.15) 633.11,315.91 ccw(c647.86,301.15) 627,301.15 ; 627,301.71 cw(c646.91,301.71) 632.83,315.79 ccw(c646.91,301.71) 627,301.71 ; 760.35,283.65 ccw(c783.03,306.32) 783.03,274.25 cw(c783.03,306.32) 760.35,283.65 ; 761.72,282.28 cw(c740.98,261.54) 770.32,261.54 ccw(c740.98,261.54) 761.72,282.28
NetR7_2: R7.2 U1.8 | length 632.2
  Top Layer w10: U1.8 460.47,107.53 470,98 470,60 453,43 453,-4 462,-13 v1(462,-63) ; 462,-41.27 cw(c440.27,-41.27) 455.64,-56.64 ccw(c440.27,-41.27) 462,-41.27 ; 462,-41.27 ccw(c483.73,-41.27) 468.36,-56.64 cw(c483.73,-41.27) 462,-41.27
  Bottom Layer w15: v1(462,-63) 527,-128 593.54,-128 R7.2 ; 473.1,-74.1 cw(c484.19,-63) 468.5,-63 ccw(c484.19,-63) 473.1,-74.1 ; 473.1,-74.1 ccw(c462,-85.19) 462,-69.5 cw(c462,-85.19) 473.1,-74.1 ; 600.73,-120.8 cw(c621.54,-141.6) 621.54,-112.18 ccw(c621.54,-141.6) 600.73,-120.8 ; R7.2@605.49,-116.05 ccw(c591.41,-101.97) 611.32,-101.97 cw(c591.41,-101.97) R7.2@605.49,-116.05
NetU1_1: U1.1 U3.4 | length 244.1
  Top Layer w10: U1.1 598.27,194.27 627.6,223.6 U3.4 ; U1.1@598.27,197.76 ccw(c598.27,206.18) 604.22,200.22 ; U1.1@598.27,197.76 ccw(c598.27,206.18) 604.22,200.22 ; U1.1@598.27,197.76 ccw(c598.27,206.18) 604.22,200.22 ; U1.1@598.27,197.76 ccw(c598.27,206.18) 604.22,200.22 ; 607.76,203.76 ccw(c578.69,232.83) 619.8,232.83 cw(c578.69,232.83) 607.76,203.76 ; 608.71,204.71 ccw(c580.98,232.44) 620.2,232.44 cw(c580.98,232.44) 608.71,204.71
NetU1_48: U1.48 U3.5 | length 679.4
  Top Layer w10: U1.48@615.34,108.91 ccw(c577.55,146.7) 631,146.7 ; U1.48@655,109 631,109 631,184 665,218 ; U3.5 665,218 ; U1.48@615.17,108.49 ccw(c576.96,146.71) 631,146.71 ; U1.48@615.17,108.49 ccw(c576.96,146.71) 631,146.71 ; U1.48@615.17,108.49 ccw(c576.96,146.71) 631,146.71 ; 665,218 cw(c675.39,218) 669.32,226.43 ccw(c675.39,218) 665,218 ; 665,218 ccw(c654.61,218) 660.68,226.43 cw(c654.61,218) 665,218 ; 665,218 cw(c675.21,218) 669.42,226.41 ccw(c675.21,218) 665,218 ; 665,218 ccw(c654.79,218) 660.58,226.41 cw(c654.79,218) 665,218 ; 641.2,194.2 ccw(c602.57,232.83) 657.2,232.83 cw(c602.57,232.83) 641.2,194.2 ; 642.15,195.15 ccw(c604.87,232.44) 657.6,232.44 cw(c604.87,232.44) 642.15,195.15 ; 658.27,211.27 ccw(c636.72,232.83) 667.2,232.83 cw(c636.72,232.83) 658.27,211.27 ; 659.22,212.22 ccw(c639.01,232.44) 667.6,232.44 cw(c639.01,232.44) 659.22,212.22
RST: CONN3.2 U1.17 | length 837.5
  Top Layer w8: v1@114,-145 v1(115,-145)
  Top Layer w10: v1@114,-145 115,-144 115,-82.87 44.22,-12.09 43.22,-11.09 43.22,15.22 57.53,29.53 U1.17 ; 115,-123.27 cw(c93.27,-123.27) 108.64,-138.64 ccw(c93.27,-123.27) 115,-123.27 ; 115,-123.27 ccw(c136.73,-123.27) 121.36,-138.64 cw(c136.73,-123.27) 115,-123.27
  Bottom Layer w15: CONN3.2 45,-126 54,-135 68,-135 78,-145 v1(115,-145) ; CONN3.2@39.86,-108.48 cw(c27.46,-120.88) 45,-120.88 ; CONN3.2@39.86,-108.48 cw(c27.46,-120.88) 45,-120.88 ; CONN3.2@39.86,-108.48 cw(c27.46,-120.88) 45,-120.88 ; CONN3.2@39.86,-108.48 cw(c27.46,-120.88) 45,-120.88 ; 45,-120.88 cw(c62.54,-120.88) CONN3.2@50.14,-108.48 ; 45,-120.88 cw(c62.54,-120.88) CONN3.2@50.14,-108.48 ; 45,-120.88 cw(c62.54,-120.88) CONN3.2@50.14,-108.48 ; 45,-120.88 cw(c62.54,-120.88) CONN3.2@50.14,-108.48 ; 99.31,-145 cw(c99.31,-160.69) 110.4,-149.6 ccw(c99.31,-160.69) 99.31,-145 ; 99.31,-145 ccw(c99.31,-129.31) 110.4,-140.4 cw(c99.31,-129.31) 99.31,-145
RXD: CONN2.4 U1.39 | length 600.1
  Top Layer w8: U1.39@651.61,-68.7 692.3,-68.7 704.76,-81.17 704.76,-126.17 v1@660,-170.93 ; U1.39@687.44,-70.21 cw(c687.44,-85.57) 698.3,-74.71 ; U1.39@687.44,-70.21 cw(c687.44,-85.57) 698.3,-74.71 ; U1.39@687.44,-70.21 cw(c687.44,-85.57) 698.3,-74.71 ; v1@660,-165 ccw(c660,-150.68) 670.12,-160.81 cw(c660,-150.68) v1@660,-165 ; v1@670,-175 cw(c703.97,-175) 679.95,-150.98 ccw(c703.97,-175) v1@670,-175
  Bottom Layer w15: v1(660,-175) 693,-208 CONN2.4@777,-208 ; CONN2.4@775.94,-220.06 CONN2.4@775.94,-208.9 ; 671.1,-186.1 cw(c682.19,-175) 666.5,-175 ccw(c682.19,-175) 671.1,-186.1 ; 671.1,-186.1 ccw(c660,-197.19) 660,-181.5 cw(c660,-197.19) 671.1,-186.1 ; 743.56,-208 ccw(c743.56,-166.51) CONN2.4@772.9,-195.85 ; 743.56,-208 ccw(c743.56,-166.51) CONN2.4@772.9,-195.85 ; 743.56,-208 ccw(c743.56,-166.51) CONN2.4@772.9,-195.85 ; 743.56,-208 ccw(c743.56,-166.51) CONN2.4@772.9,-195.85
TCK: CONN3.8 U1.24 | length 458.6
  Top Layer w10: v1(220,-145) 256.73,-108.27 U1.24 ; 235.36,-129.64 cw(c220,-114.27) 220,-136 ccw(c220,-114.27) 235.36,-129.64 ; 235.36,-129.64 ccw(c250.73,-145) 229,-145 cw(c250.73,-145) 235.36,-129.64
  Bottom Layer w15: CONN3.8 195,-120 v1(220,-145) ; CONN3.8@202.12,-104.81 ccw(c236.48,-111.87) v1@211.67,-136.67 ; CONN3.8@202.12,-104.81 ccw(c236.48,-111.87) v1@211.67,-136.67 ; CONN3.8@202.12,-104.81 ccw(c236.48,-111.87) v1@211.67,-136.67 ; CONN3.8@202.12,-104.81 ccw(c236.48,-111.87) v1@211.67,-136.67 ; 208.9,-133.9 cw(c197.81,-145) 213.5,-145 ccw(c197.81,-145) 208.9,-133.9 ; 208.9,-133.9 ccw(c220,-122.81) 220,-138.5 cw(c220,-122.81) 208.9,-133.9
TDI: CONN3.4 U1.23 | length 756.6
  Top Layer w10: v1(110,0) 159,-49 213,-49 252.58,-88.58 U1.23 ; 125.36,-15.36 cw(c140.73,0) 119,0 ccw(c140.73,0) 125.36,-15.36 ; 125.36,-15.36 ccw(c110,-30.73) 110,-9 cw(c110,-30.73) 125.36,-15.36
  Bottom Layer w15: CONN3.4 95,-32 109,-18 ; v1(110,0) 109,-1 109,-18 ; CONN3.4@87.65,-52.62 cw(c103.85,-47.27) 91.79,-35.21 ; CONN3.4@87.65,-52.62 cw(c103.85,-47.27) 91.79,-35.21 ; CONN3.4@87.65,-52.62 cw(c103.85,-47.27) 91.79,-35.21 ; CONN3.4@87.65,-52.62 cw(c103.85,-47.27) 91.79,-35.21 ; CONN3.4@101.9,-47.92 cw(c129.72,-38.72) 109,-18 ; CONN3.4@101.9,-47.92 cw(c129.72,-38.72) 109,-18 ; CONN3.4@101.9,-47.92 cw(c129.72,-38.72) 109,-18 ; CONN3.4@101.9,-47.92 cw(c129.72,-38.72) 109,-18 ; 103.5,-23.5 ccw(c92.96,-12.96) v1@104.83,-3.93 ; 103.5,-23.5 ccw(c92.96,-12.96) v1@104.83,-3.93 ; 103.5,-23.5 ccw(c92.96,-12.96) v1@104.83,-3.93 ; 103.5,-23.5 ccw(c92.96,-12.96) v1@104.83,-3.93 ; 109,-18.03 cw(c127.91,-18.03) v1@114.58,-4.61 ; 109,-18.03 cw(c127.91,-18.03) v1@114.58,-4.61 ; 109,-18.03 cw(c127.91,-18.03) v1@114.58,-4.61 ; 109,-18.03 cw(c127.91,-18.03) v1@114.58,-4.61
TDO: CONN3.6 U1.22 | length 573.2
  Top Layer w10: v1(165,0) 194,-29 223,-29 262.9,-68.9 U1.22 ; v1@165,-9 cw(c165,-30.73) 180.36,-15.36 ; v1@165,-9 cw(c165,-30.73) 180.36,-15.36 ; v1@165,-9 cw(c165,-30.73) 180.36,-15.36 ; v1@165,-9 cw(c165,-30.73) 180.36,-15.36 ; v1@174,0 ccw(c195.73,0) 180.36,-15.36 ; v1@174,0 ccw(c195.73,0) 180.36,-15.36 ; v1@174,0 ccw(c195.73,0) 180.36,-15.36 ; v1@174,0 ccw(c195.73,0) 180.36,-15.36
  Bottom Layer w15: CONN3.6 145,-20 v1(165,0) ; CONN3.6@139.86,-45.06 ccw(c127.46,-32.66) 145,-32.66 ; CONN3.6@139.86,-45.06 ccw(c127.46,-32.66) 145,-32.66 ; CONN3.6@139.86,-45.06 ccw(c127.46,-32.66) 145,-32.66 ; CONN3.6@139.86,-45.06 ccw(c127.46,-32.66) 145,-32.66 ; 145,-32.66 ccw(c162.54,-32.66) CONN3.6@150.14,-45.06 ; 145,-32.66 ccw(c162.54,-32.66) CONN3.6@150.14,-45.06 ; 145,-32.66 ccw(c162.54,-32.66) CONN3.6@150.14,-45.06 ; 145,-32.66 ccw(c162.54,-32.66) CONN3.6@150.14,-45.06 ; 153.9,-11.1 cw(c165,-22.19) 165,-6.5 ccw(c165,-22.19) 153.9,-11.1 ; 153.9,-11.1 ccw(c142.81,0) 158.5,0 cw(c142.81,0) 153.9,-11.1
TMS: CONN3.10 U1.21 | length 673.8
  Top Layer w10: v1(260,0) 260,-35 274.21,-49.21 U1.21 ; v1@253.64,-6.36 cw(c238.27,-21.73) 260,-21.73 ; v1@253.64,-6.36 cw(c238.27,-21.73) 260,-21.73 ; v1@253.64,-6.36 cw(c238.27,-21.73) 260,-21.73 ; v1@253.64,-6.36 cw(c238.27,-21.73) 260,-21.73 ; 260,-21.73 cw(c281.73,-21.73) v1@266.36,-6.36 ; 260,-21.73 cw(c281.73,-21.73) v1@266.36,-6.36 ; 260,-21.73 cw(c281.73,-21.73) v1@266.36,-6.36 ; 260,-21.73 cw(c281.73,-21.73) v1@266.36,-6.36
  Bottom Layer w15: CONN3.10@246,-74 246,-29 260,-15 ; v1(260,0) 260,-15 ; CONN3.10@239.86,-45.06 ccw(c225.05,-30.25) 246,-30.25 ; CONN3.10@239.86,-45.06 ccw(c225.05,-30.25) 246,-30.25 ; CONN3.10@239.86,-45.06 ccw(c225.05,-30.25) 246,-30.25 ; CONN3.10@239.86,-45.06 ccw(c225.05,-30.25) 246,-30.25 ; 246,-35.07 ccw(c260.12,-35.07) CONN3.10@250.14,-45.06 ; 246,-35.07 ccw(c260.12,-35.07) CONN3.10@250.14,-45.06 ; 246,-35.07 ccw(c260.12,-35.07) CONN3.10@250.14,-45.06 ; 246,-35.07 ccw(c260.12,-35.07) CONN3.10@250.14,-45.06 ; 253.5,-21.5 ccw(c243.95,-11.95) v1@254.79,-3.88 ; 253.5,-21.5 ccw(c243.95,-11.95) v1@254.79,-3.88 ; 253.5,-21.5 ccw(c243.95,-11.95) v1@254.79,-3.88 ; 253.5,-21.5 ccw(c243.95,-11.95) v1@254.79,-3.88 ; 260,-15 cw(c274.06,-15) 264.44,-4.74 ccw(c274.06,-15) 260,-15 ; 260,-15 ccw(c245.94,-15) 255.56,-4.74 cw(c245.94,-15) 260,-15 ; 260,-15 ccw(c283.15,-38.15) 251.93,-48.01 cw(c283.15,-38.15) 260,-15 ; CONN3.10@237.62,-52.53 cw(c256.59,-46.54) 242.53,-32.47 ccw(c256.59,-46.54) CONN3.10@237.62,-52.53
TRST: U1.20
TXD: CONN2.3 U1.40 | length 625.9
  Top Layer w8: U1.40 695.43,-49.21 720.76,-74.54 720.76,-143.56 710,-154.31 ; v1(710,-175) 710,-154.31 ; U1.40@687.44,-50.53 cw(c687.44,-72.99) 703.33,-57.11 ; U1.40@687.44,-50.53 cw(c687.44,-72.99) 703.33,-57.11 ; U1.40@687.44,-50.53 cw(c687.44,-72.99) 703.33,-57.11 ; U1.40@687.85,-50.46 cw(c691.41,-61.22) 699.43,-53.21 ; U1.40@687.85,-50.46 cw(c691.41,-61.22) 699.43,-53.21 ; U1.40@687.85,-50.46 cw(c691.41,-61.22) 699.43,-53.21 ; 710,-154.31 cw(c693.61,-154.31) 703.79,-167.16 ccw(c693.61,-154.31) 710,-154.31 ; 710,-154.31 ccw(c726.39,-154.31) 716.21,-167.16 cw(c726.39,-154.31) 710,-154.31
  Bottom Layer w8: CONN2.3 CONN2.3@815.32,-170.32
  Bottom Layer w15: v1@709,-175 v1(710,-175) 711,-175 737,-149 800,-149 815.32,-164.32 CONN2.3 ; v1@710,-168.5 ccw(c710,-150.39) 722.8,-163.2 cw(c710,-150.39) v1@710,-168.5 ; 796.73,-145.73 cw(c762.25,-180.2) 811,-180.2 ccw(c762.25,-180.2) 796.73,-145.73
VBUS: C5.2 C6.2 C7.2 F1.2 L1.2 R1.1 R2.1 R5.2 U1.3 U1.4 U1.42 U2.1 U2.3 U3.6 | length 4420.7
  Top Layer w8: U1.42 U1.42@653.2,-8.06 ; U1.42@653.2,-11.62 702.62,-11.62 721,-30 779,-30 786.69,-22.31 786.69,149.22 755,180.91 R2.1 ; U1.42@688.2,-8.49 ccw(c695.75,-0.94) 695.75,-11.62 ; U1.42@688.37,-8.91 ccw(c694.91,-2.37) 694.91,-11.62 ; U1.42@688.37,-8.91 ccw(c694.91,-2.37) 694.91,-11.62 ; U1.42@688.37,-8.91 ccw(c694.91,-2.37) 694.91,-11.62 ; R2.1@762.5,192.04 ccw(c788.47,185.36) 769.51,166.4 cw(c788.47,185.36) R2.1@762.5,192.04 ; R2.1@770.25,190.04 ccw(c804.23,181.3) 779.42,156.49 cw(c804.23,181.3) R2.1@770.25,190.04
  Top Layer w10: C6.2 574,317.5 574,247 558.9,231.9 558.9,71.9 544,57 544,42 526,24 526,-3 541,-18 578,-18 586.16,-9.84 U1.42 ; 571.57,319.93 cw(c596.63,345) 561.18,345 ccw(c596.63,345) 571.57,319.93 ; 571.56,319.93 ccw(c546.5,294.86) 546.5,330.32 cw(c546.5,294.86) 571.56,319.93
  Top Layer w15: R2.1 780.54,219 823,219 855,251 R5.2@855,261 ; R2.1@756.97,203.68 ccw(c756.97,223.59) 771.05,209.51 cw(c756.97,223.59) R2.1@756.97,203.68 ; R2.1@767.18,193.46 cw(c796.6,193.46) 775.8,214.27 ccw(c796.6,193.46) R2.1@767.18,193.46 ; 829.25,225.25 ccw(c796.28,258.23) 842.83,260.94 cw(c796.28,258.23) 829.25,225.25
  Top Layer w20: U3.6@709.23,239.23 R2.1 ; U2.3 947.4,-257.6 v1(980,-225) ; U2.1@723,-332.4 797,-332.4 797,-257.6 ; R5.2@855,261 v1(969,261) ; 769.32,-332.4 ccw(c769.32,-300.82) C7.2@791.66,-323.15 ; 769.32,-332.4 ccw(c769.32,-300.82) C7.2@791.66,-323.15 ; 769.32,-332.4 ccw(c769.32,-300.82) C7.2@791.66,-323.15 ; 769.32,-332.4 ccw(c769.32,-300.82) C7.2@791.66,-323.15 ; C7.2@791.66,-323.15 ccw(c778.75,-310.25) 797,-310.25 ; C7.2@791.66,-323.15 ccw(c778.75,-310.25) 797,-310.25 ; C7.2@791.66,-323.15 ccw(c778.75,-310.25) 797,-310.25 ; C7.2@791.66,-323.15 ccw(c778.75,-310.25) 797,-310.25 ; 797,-302.99 ccw(c825.52,-302.99) C7.2@805.35,-323.15 ; 797,-302.99 ccw(c825.52,-302.99) C7.2@805.35,-323.15 ; 797,-302.99 ccw(c825.52,-302.99) C7.2@805.35,-323.15 ; 797,-302.99 ccw(c825.52,-302.99) C7.2@805.35,-323.15 ; R5.2@862.42,266.99 ccw(c876.89,281.46) 876.89,261 ; R5.2@862.42,266.99 ccw(c876.89,281.46) 876.89,261 ; R5.2@862.42,266.99 ccw(c876.89,281.46) 876.89,261 ; R5.2@862.42,266.99 ccw(c876.89,281.46) 876.89,261 ; 900.57,261 ccw(c900.57,292.93) C5.2@923.15,270.35 ; 900.57,261 ccw(c900.57,292.93) C5.2@923.15,270.35 ; 900.57,261 ccw(c900.57,292.93) C5.2@923.15,270.35 ; 900.57,261 ccw(c900.57,292.93) C5.2@923.15,270.35 ; C5.2@936.85,270.35 ccw(c959.43,292.93) v1@959.43,261 ; C5.2@936.85,270.35 ccw(c959.43,292.93) v1@959.43,261 ; C5.2@936.85,270.35 ccw(c959.43,292.93) v1@959.43,261 ; C5.2@936.85,270.35 ccw(c959.43,292.93) v1@959.43,261 ; U3.6@702.4,230.04 cw(c702.4,191.36) 729.75,218.71 ccw(c702.4,191.36) U3.6@702.4,230.04 ; R2.1@738.47,210 cw(c721.93,193.46) 745.31,193.46 ccw(c721.93,193.46) R2.1@738.47,210
  Bottom Layer w8: F1.2 F1.2@1086,-181
  Bottom Layer w20: v1(969,261) 969,260 1027,202 1096,202 1096,-95.5 L1.2@1091.5,-100 ; v1(980,-225) 1007.99,-197.01 F1.2 1070,-169 ; L1.2 1096.5,-142.5 ; 1023.33,-197.01 cw(c1023.33,-229.89) F1.2@1046.59,-206.64 ; 1023.33,-197.01 ccw(c1023.33,-164.12) F1.2@1046.59,-187.38 ; 1023.33,-197.01 cw(c1023.33,-229.89) F1.2@1046.59,-206.64 ; 1023.33,-197.01 ccw(c1023.33,-164.12) F1.2@1046.59,-187.38 ; 1023.33,-197.01 ccw(c1023.33,-164.12) F1.2@1046.59,-187.38 ; 1023.33,-197.01 cw(c1023.33,-229.89) F1.2@1046.59,-206.64 ; 1023.33,-197.01 ccw(c1023.33,-164.12) F1.2@1046.59,-187.38 ; 1023.33,-197.01 cw(c1023.33,-229.89) F1.2@1046.59,-206.64 ; F1.2@1061.59,-186.29 ccw(c1048.02,-169) 1070,-169 ; F1.2@1061.59,-186.29 ccw(c1048.02,-169) 1070,-169 ; F1.2@1061.59,-186.29 ccw(c1048.02,-169) 1070,-169 ; F1.2@1061.59,-186.29 ccw(c1048.02,-169) 1070,-169 ; 1070,-169 ccw(c1091.98,-169) F1.2@1078.41,-186.29 ; 1070,-169 ccw(c1091.98,-169) F1.2@1078.41,-186.29 ; 1070,-169 ccw(c1091.98,-169) F1.2@1078.41,-186.29 ; 1070,-169 ccw(c1091.98,-169) F1.2@1078.41,-186.29 ; 1070,-169 1096.5,-142.5 ; 1073.28,202 cw(c1073.28,181.78) R1.1@1087.58,196.08 ; 1073.28,202 cw(c1073.28,181.78) R1.1@1087.58,196.08 ; 1073.28,202 cw(c1073.28,181.78) R1.1@1087.58,196.08 ; 1073.28,202 cw(c1073.28,181.78) R1.1@1087.58,196.08 ; L1.2@1089.65,-106.85 cw(c1073.11,-123.38) 1096.5,-123.38 ; L1.2@1089.65,-106.85 cw(c1073.11,-123.38) 1096.5,-123.38 ; L1.2@1089.65,-106.85 cw(c1073.11,-123.38) 1096.5,-123.38 ; L1.2@1089.65,-106.85 cw(c1073.11,-123.38) 1096.5,-123.38 ; L1.2@1089.65,-93.15 ccw(c1074.31,-77.82) 1096,-77.82 ; L1.2@1089.65,-93.15 ccw(c1074.31,-77.82) 1096,-77.82 ; L1.2@1089.65,-93.15 ccw(c1074.31,-77.82) 1096,-77.82 ; L1.2@1089.65,-93.15 ccw(c1074.31,-77.82) 1096,-77.82 ; 1096,-75.42 ccw(c1121.08,-75.42) L1.2@1103.34,-93.15 ; 1096,-75.42 ccw(c1121.08,-75.42) L1.2@1103.34,-93.15 ; 1096,-75.42 ccw(c1121.08,-75.42) L1.2@1103.34,-93.15 ; 1096,-75.42 ccw(c1121.08,-75.42) L1.2@1103.34,-93.15 ; 1096,180.57 cw(c1117.94,180.57) R1.1@1102.42,196.08 ; 1096,180.57 cw(c1117.94,180.57) R1.1@1102.42,196.08 ; 1096,180.57 cw(c1117.94,180.57) R1.1@1102.42,196.08 ; 1096,180.57 cw(c1117.94,180.57) R1.1@1102.42,196.08 ; 1096.5,-142.5 ccw(c1120.63,-166.64) 1094.29,-188.34 cw(c1120.63,-166.64) 1096.5,-142.5 ; 1096.5,-123.38 cw(c1119.88,-123.38) L1.2@1103.34,-106.85 ; 1096.5,-123.38 cw(c1119.88,-123.38) L1.2@1103.34,-106.85 ; 1096.5,-123.38 cw(c1119.88,-123.38) L1.2@1103.34,-106.85 ; 1096.5,-123.38 cw(c1119.88,-123.38) L1.2@1103.34,-106.85 ; F1.2@1063.42,-213.78 cw(c1086.49,-194.78) 1065.35,-173.65 ccw(c1086.49,-194.78) F1.2@1063.42,-213.78 ; F1.2@1078.86,-201.06 cw(c1103.56,-180.71) 1080.92,-158.08 ccw(c1103.56,-180.71) F1.2@1078.86,-201.06
pads on no net: CONN1.0 CONN1.6 CONN3.0 CONN3.9 U1.11 U1.12 U1.13 U1.15 U1.16 U1.19 U1.27 U1.28 U1.29 U1.30 U1.32 U1.33 U1.35 U1.36 U1.37 U1.38 U1.41 X1.2 X1.4

## Polygon pours and split planes (outlines as drawn)
GND on Bottom Layer "Bottom Layer-GND" (solid, remove dead copper, pour order 1001): 1160,380 1160,-382.35 475.3,-382.35 16,-132 15.51,129.23 475.3,380
GND on Top Layer "Top Layer-GND" (solid, remove dead copper, pour order 1000): 1160,-382 1160,380 475,380 16,129 16,-133 475,-382

## Other copper
Top Layer:
  rectangle net GND: 804,62 922,92
  rectangle net GND: 682,-308 761,-281
  rectangle net VBUS: 539.21,150 559,175
Bottom Layer:
  rectangle net GND: 16,26 51,128.36
  rectangle net GND: 41,23 217,140
  rectangle net GND: 400,115 468,204
  rectangle net GND: 401,250 468,340
  rectangle net GND: 845,113 887,344
  rectangle net GND: 900,-382 990,-301
  rectangle net GND: 681,-383 769,-295
  rectangle net GND: 624,117 691,342
  pour cut-out: 405.43,336.54 405.43,120 870,120 870,336.54

## Silkscreen, mask and mechanical layers (free items; w line width, h text height)
Top Overlay:
  text "Pwr" at 1033,258 h40
  text "FOSS JTAG" at 185,-155 h50 r90
  text "A" at 903,-342 h185
Bottom Overlay:
  text "B" at 1160,301 h150
  text "RX" at 765,-152 h35 r270
  text "TX" at 804,-152 h35 r270
  text "+5" at 844,-152 h35 r270
  text "0V" at 882,-152 h35 r270
Dimensions:
  the board outline again, w3.94
  text "Board Outline" at 70,180 h60 r29

## Dimensions
1181.1,-395 to 0,-133.78 on Dimensions
472.44,-395 to 472.44,392.4 on Dimensions